# EAGLE board MAGNEBOT328RTM (EAGLE 7.6.0)
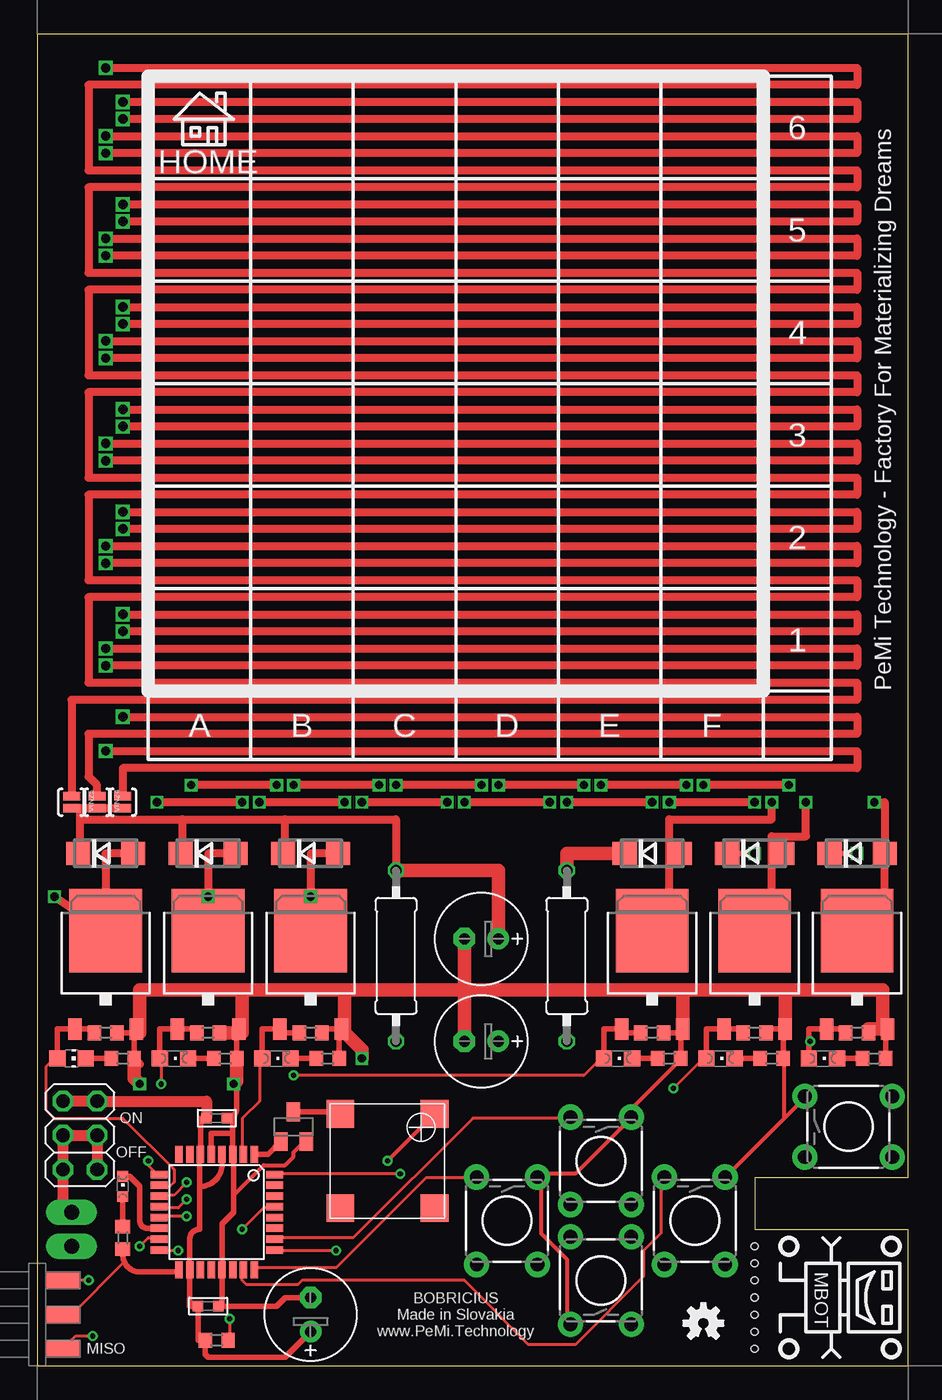
[diagram p0: board, top side]
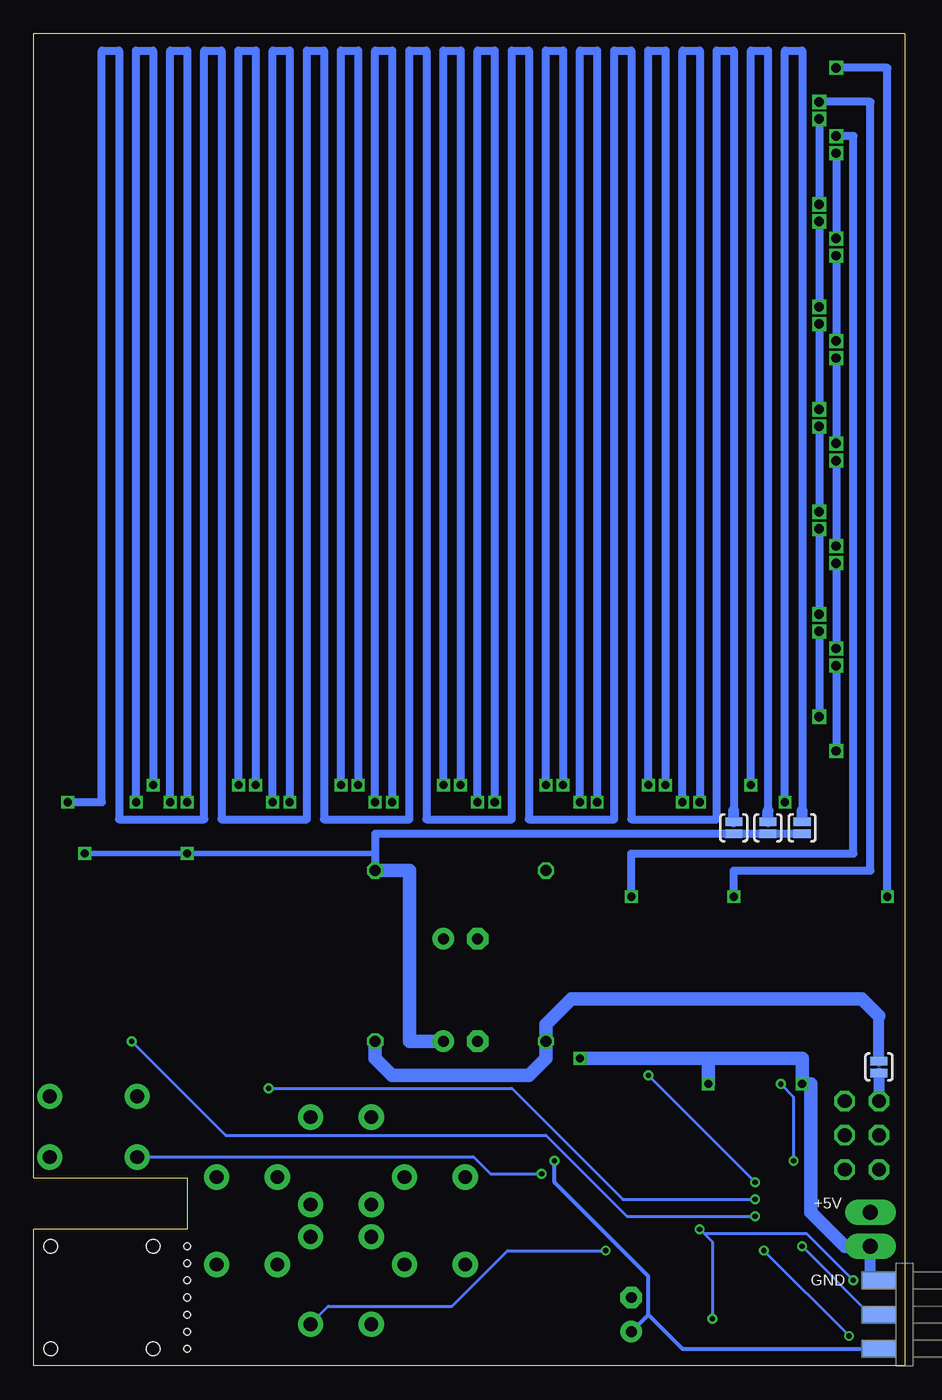
[diagram p1: board, bottom side, seen from below]

Size 64.77 x 99.06 mm. Coordinates in mm from the lower left corner, seen from the top.
Outline: 64.77,0 64.77,10.16 53.34,10.16 53.34,13.97 64.77,13.97 64.77,99.06 0,99.06 0,0 64.77,0
Copper layers (1*16): Top 0.0356mm / dielectric 1.5011mm / Bottom 0.0356mm
Design rules "LaenPCBOrder *": minimum track width 6mil, minimum drill 13mil, track to track 6mil, track to pad 6mil, pad to pad 6mil, via to via 6mil, smd to smd 6mil, copper to edge 15mil, drill to drill 6mil, minimum pad ring 7mil, minimum via ring 7mil, stop-mask expansion 4mil, vias tented up to drill 30mil, thermal gap 10mil
Net classes: 0 default: width 0.229 mm, drill 0.381 mm, clearance 0.254 mm; 1 vcc: width 0.305 mm, drill 0.381 mm, clearance 0.254 mm; 2 gnd: width 0.305 mm, drill 0.381 mm, clearance 0.254 mm
Holes 1 mm at 63.5,8.89 63.5,1.27 55.88,1.27 55.88,8.89
Holes 0.5 mm at 53.34,8.89 53.34,7.62 53.34,6.35 53.34,5.08 53.34,3.81 53.34,2.54 53.34,1.27

## Footprints (pad centres in the part's own frame; a part is rotated, then mirrored left to right if it is on the bottom)
E2,5-7 = drill 0.813 pad 1.6: + -1.27,0 | drill 0.813 pad 1.6 octagon: - 1.27,0
C0603 = smd 0.8 x 0.8: 1 -0.762,0; 2 0.762,0
DO214AC = smd 1.8 x 1.7: A 2.05,0; C -2.05,0
TQFP32-08 = smd 1.27 x 0.559: 1 -4.293,2.8; 2 -4.293,2; 3 -4.293,1.2; 4 -4.293,0.4; 5 -4.293,-0.4; 6 -4.293,-1.2; 7 -4.293,-2; 8 -4.293,-2.8; 17 4.293,-2.8; 18 4.293,-2; 19 4.293,-1.2; 20 4.293,-0.4; 21 4.293,0.4; 22 4.293,1.2; 23 4.293,2; 24 4.293,2.8 | smd 0.559 x 1.27: 9 -2.8,-4.293; 10 -2,-4.293; 11 -1.2,-4.293; 12 -0.4,-4.293; 13 0.4,-4.293; 14 1.2,-4.293; 15 2,-4.293; 16 2.8,-4.293; 25 2.8,4.293; 26 2,4.293; 27 1.2,4.293; 28 0.4,4.293; 29 -0.4,4.293; 30 -1.2,4.293; 31 -2,4.293; 32 -2.8,4.293
6_PIN_EDGE = smd 1.27 x 2.54: 1 2.54,0; 3 0,0; 5 -2.54,0 | smd 1.27 x 2.54 bottom: 2 2.54,0; 4 0,0; 6 -2.54,0
1X02_LONGPADS = drill 1.118 pad 1.88 long: 1 0,0; 2 2.54,0
2X03 = drill 1.016 octagon: 1 -2.54,-1.27; 2 -2.54,1.27; 3 0,-1.27; 4 0,1.27; 5 2.54,-1.27; 6 2.54,1.27
CHIPLED_0603 = smd 0.8 x 0.8: A 0,-0.75; C 0,0.75
CHIP-LED0805 = smd 1.2 x 1.2: A 0,-1.05; C 0,1.05
CHIPLED_0805 = smd 1.2 x 1.2: A 0,-1.05; C 0,1.05
SOT23 = smd 1 x 1.4: 1 -0.95,-1.1; 2 0.95,-1.1; 3 0,1.1
R0603 = smd 1 x 1.1: 1 -0.85,0; 2 0.85,0
0309/12 = drill 0.813 octagon: 1 -6.35,0; 2 6.35,0
TACTILE-PTH = drill 1.016 pad 1.88: 1 -3.251,2.261; 2 3.251,2.261; 3 -3.251,-2.261; 4 3.251,-2.261
TO252 = smd 1 x 1.6: 1 -2.28,-4.8; 2 2.28,-4.8 | smd 5.4 x 6.2: 3 0,2.5
SMT-8585-BUZZER = smd 2.05 x 2.05: + -3.5,-3.5; - 3.5,-3.5; NC1 -3.5,3.5; NC2 3.5,3.5
SJ_2S-NO = smd 0.635 x 1.27: 1 -0.45,0; 2 0.45,0

## Placement (x,y rotation side)
C1  10uF  [E2,5-7]  33.02,24.13 180 top
C2  10uF  [E2,5-7]  20.32,3.81 90 top
C4  10uF  [E2,5-7]  33.02,31.75 180 top
C14  100nF  [C0603]  12.7,4.45 0 top
C15  100nF  [C0603]  13.33,18.41 0 top
D2  [DO214AC]  5.08,38.1 0 top
D3  [DO214AC]  12.7,38.1 0 top
D4  [DO214AC]  20.32,38.1 0 top
D6  [DO214AC]  45.72,38.1 0 top
D7  [DO214AC]  53.34,38.1 0 top
D8  [DO214AC]  60.96,38.1 0 top
IC1  ATMEGA328P  [TQFP32-08]  13.33,11.43 270 top
ISP_HEADER  6_PIN_ISPEDGE-NORM  [6_PIN_EDGE]  1.91,3.81 270 top
J5  [1X02_LONGPADS]  2.54,8.89 90 top
JP4  [2X03]  3.18,17.14 90 top
LED1  [CHIPLED_0603]  6.35,13.34 0 top
LED2  [CHIP-LED0805]  2.54,22.86 270 top
LED3  [CHIPLED_0805]  10.16,22.86 270 top
LED4  [CHIPLED_0805]  17.78,22.86 270 top
LED6  [CHIPLED_0805]  43.18,22.86 270 top
LED7  [CHIPLED_0805]  50.8,22.86 270 top
LED8  [CHIPLED_0805]  58.42,22.86 270 top
LOGO3  OSHW-LOGOS  [OSHW-LOGO-S]  49.53,3.18 0 top
Q1  BSS123  [SOT23]  19.05,17.78 0 top
R1  4k7  [R0603]  13.33,1.9 0 top
R2  1k  [R0603]  6.35,9.53 90 top
R3  10R  [0309/12]  26.67,30.48 270 top
R4  10R  [0309/12]  39.37,30.48 270 top
R5  4.7k  [R0603]  5.08,24.77 180 top
R9  4.7k  [R0603]  6.35,22.86 180 top
R10  4.7k  [R0603]  12.7,24.77 180 top
R11  4.7k  [R0603]  13.97,22.86 180 top
R12  4.7k  [R0603]  20.32,24.77 180 top
R13  4.7k  [R0603]  21.59,22.86 180 top
R16  4.7k  [R0603]  45.72,24.77 180 top
R17  4.7k  [R0603]  46.99,22.86 180 top
R18  4.7k  [R0603]  53.34,24.77 180 top
R21  4.7k  [R0603]  54.61,22.86 180 top
R22  4.7k  [R0603]  60.96,24.77 180 top
R23  4.7k  [R0603]  62.23,22.86 180 top
S1  pb22  [TACTILE-PTH]  34.92,10.79 270 top
S3  pb22  [TACTILE-PTH]  41.91,6.35 90 top
S4  pb22  [TACTILE-PTH]  48.89,10.79 270 top
S5  pb22  [TACTILE-PTH]  41.91,15.24 270 top
S6  pb22  [TACTILE-PTH]  60.32,17.78 0 top
T2  IRLR110-ND  [TO252]  5.08,29.84 0 top
T3  IRLR110-ND  [TO252]  12.7,29.84 0 top
T4  IRLR110-ND  [TO252]  20.32,29.84 0 top
T6  IRLR110-ND  [TO252]  45.72,29.84 0 top
T7  IRLR110-ND  [TO252]  53.34,29.84 0 top
T8  IRLR110-ND  [TO252]  60.96,29.84 0 top
U$2  BUZZER  [SMT-8585-BUZZER]  26.03,15.24 180 top
VINZ  SOLDERJUMPERNO  [SJ_2S-NO]  7.62,40 270 bottom
VINZ1  SOLDERJUMPERNO  [SJ_2S-NO]  10.16,40 270 bottom
VINZ2  SOLDERJUMPERNO  [SJ_2S-NO]  12.7,40 270 bottom
VINZ3  SOLDERJUMPERNO  [SJ_2S-NO]  6.35,41.91 270 top
VINZ4  SOLDERJUMPERNO  [SJ_2S-NO]  4.45,41.91 270 top
VINZ5  SOLDERJUMPERNO  [SJ_2S-NO]  2.54,41.91 270 top
VINZ6  SOLDERJUMPERNO  [SJ_2S-NO]  1.91,22.23 90 bottom

## Library data of the parts
C1 C2 C4 R1-R5 R9-R13 R16-R18 R21-R23 = rcl
C14 C15 = rc-master-smd
D2-D4 D6-D8 = diode
IC1 = atmel; MPN: ATMEGA8-16AU; OC_FARNELL: 9171371; OC_NEWARK: 73M8863
ISP_HEADER = ppeter
J5 = SparkFun-Connectors
JP4 = pinhead
LED1-LED4 LED6-LED8 = led
LOGO3 = SparkFun-Aesthetics
Q1 = transistor-small-signal
S1 S3-S6 = SparkFun-Electromechanical; PROD_ID: SWCH-08441
T2-T4 T6-T8 = JVN
U$2 = adafruit
VINZ VINZ1-VINZ6 = SparkFun

## Nets
A0: IC1.23 S4.3
A1: IC1.24 S1.3
A2: IC1.25 S3.3
A3: IC1.26 S5.3
ADC6: IC1.19
ADC7: IC1.22
AREF: IC1.20
D2: IC1.32 S6.3
D3: IC1.1 Q1.1
D4: IC1.2 LED4.A R12.2 T4.1
D5: IC1.9 LED3.A R10.2 T3.1
D6: IC1.10 LED2.A R5.2 T2.1
D7: IC1.11 LED6.A R16.2 T6.1
D8: IC1.12 LED7.A R18.2 T7.1
D9: IC1.13 LED8.A R22.2 T8.1
D10: IC1.14 LED1.C
GND [vcc]: C1.- C2.- C4.- C14.2 C15.2 IC1.3 IC1.5 IC1.21 ISP_HEADER.6 J5.1 Q1.2 R5.1 R9.1 R10.1 R11.1 R12.1 R13.1 R16.1 R17.1 R18.1 R21.1 R22.1 R23.1 S1.1 S3.1 S4.1 S5.1 S6.1 T2.2 T3.2 T4.2 T6.2 T7.2 T8.2
MISO: IC1.16 ISP_HEADER.1
MOSI: IC1.15 ISP_HEADER.4
N$6: LED1.A R2.2
N$8: LED2.C R9.2
N$10: LED6.C R17.2
N$12: LED3.C R11.2
N$14: LED7.C R21.2
N$19: LED4.C R13.2
N$21: LED8.C R23.2
OUT: Q1.3 U$2.-
PB6: IC1.7
PB7: IC1.8
RESET: IC1.29 ISP_HEADER.5 R1.2
RXD: IC1.30
SCK: IC1.17 ISP_HEADER.3 R2.1
SCL: IC1.28
SDA: IC1.27
TXD: IC1.31
VCC [gnd]: C2.+ C14.1 C15.1 IC1.4 IC1.6 IC1.18 ISP_HEADER.2 JP4.5 JP4.6 R1.1 U$2.+ VINZ6.1
VIN: J5.2 JP4.1 JP4.2 JP4.3 JP4.4
VINX [gnd]: C4.+ D2.C D3.C D4.C R3.1 VINZ3.2 VINZ4.2 VINZ5.2
VINY [gnd]: C1.+ D6.C D7.C D8.C R4.1 VINZ1.2 VINZ2.2 VINZ.2
VUSB: R3.2 R4.2 VINZ6.2
X1: D2.A T2.3 VINZ5.1
X2: D3.A T3.3 VINZ4.1
X3: D4.A T4.3 VINZ3.1
Y1: D6.A T6.3 VINZ.1
Y2: D7.A T7.3 VINZ1.1
Y3: D8.A T8.3 VINZ2.1

## Tracks (layer width: path | path; a pad name or v marks a point on that pad's centre or on a via)
A0
  Top 0.229: IC1.23 15.24,6.99 15.24,6.35 15.56,6.03 19.37,6.03 19.69,6.35 31.75,6.35 36.51,1.59 40,1.59 45.09,6.67 45.09,8.57 46.35,9.84 46.35,13.97 S4.3
A1
  Top 0.229: IC1.24 16.19,7.3 22.23,7.3 28.89,13.97 32.38,13.97 S1.3
A2  (via drill 0.38)
  Top 0.229: v22.23,8.57 17.78,8.57 IC1.25
  Bottom 0.229: v22.23,8.57 29.53,8.57 33.66,4.45 42.86,4.45 44.13,3.18 S3.3
A3
  Top 0.229: IC1.26 17.78,9.53 23.49,9.53 32.38,18.41 39.37,18.41 S5.3
D2  (via drill 0.38)
  Top 0.229: v26.99,14.29 17.78,14.29 IC1.32
  Bottom 0.229: v26.99,14.29 30.8,14.29 32.07,15.56 56.83,15.56 S6.3
D3
  Top 0.406: IC1.1 17.14,15.72 Q1.1
D4
  Top 0.229: IC1.2 15.24,15.88 15.24,18.41 16.51,19.68 16.51,22.86 LED4.A
  Top 0.406: R12.2 18.04,24.77 T4.1 16.73,25.05 LED4.A
D5  (via drill 0.38)
  Top 0.229: v8.26,15.24 8.26,14.92 8.89,14.29 IC1.9 | v9.21,20.96 9.21,22.86 LED3.A
  Top 0.406: R10.2 11.85,25.05 T3.1 9.11,25.05 LED3.A
  Bottom 0.229: v8.26,15.24 8.26,20 v9.21,20.96
D6
  Top 0.229: IC1.10 9.21,13.34 9.84,13.34 10.16,13.65 10.16,14.61 6.35,18.41 1.27,18.41 0.64,19.05 0.64,22.23 1.27,22.86 LED2.A
  Top 0.406: R5.2 4.23,25.05 T2.1 1.49,25.05 LED2.A
D7  (via drill 0.38)
  Top 0.229: v11.11,13.65 10.16,12.7 9.21,12.7 IC1.11 | v19.05,21.59 40.64,21.59 41.91,22.86 LED6.A
  Top 0.406: LED6.A 42.13,25.05 T6.1 43.44,24.77 R16.2
  Bottom 0.229: v19.05,21.59 v11.11,13.65
D8  (via drill 0.38)
  Top 0.229: v11.11,12.38 10.48,11.75 9.21,11.75 IC1.12 | v47.31,20.64 49.53,22.86 LED7.A
  Top 0.406: R18.2 52.49,25.05 T7.1 49.75,25.05 LED7.A
  Bottom 0.229: v11.11,12.38 20.95,12.38 29.21,20.64 v47.31,20.64
D9  (via drill 0.38)
  Top 0.229: v11.11,11.11 9.21,11.11 IC1.13 | v57.47,24.13 57.37,24.13
  Top 0.406: LED8.A 57.37,24.13 57.37,25.05 T8.1 60.11,25.05 R22.2
  Bottom 0.229: v11.11,11.11 20.64,11.11 26.67,17.14 50.48,17.14 v57.47,24.13
D10
  Top 0.406: LED1.C 6.87,14.09 7.62,13.34 7.62,10.79 arc90 8.19,10.23 IC1.14
GND  (via drill 0.6)
  Top 0.305: S3.1 39.37,3.18 39.37,7.94 37.46,9.84 37.46,13.97 S1.1 37.46,14.29 40,14.29 44.13,18.41 S5.1 44.45,18.73 44.45,19.37 47.94,22.86 R17.1 | 14.6,12.7 16.83,14.92 18.41,14.92 19.05,15.56 19.05,15.88 19.69,16.51 Q1.2 | 55.56,18.41 57.15,20 S6.1 | 55.56,18.41 51.43,14.29 S4.1 | 55.56,18.41 55.56,22.86 R21.1
  Top 0.406: R5.1 7.36,24.77 T2.2 7.2,25.05 R9.1 | R10.1 14.98,24.77 T3.2 14.82,25.05 R11.1 14.82,19.14 arc-90 C15.2 14.54,18.41 14.54,17.29 | T4.2 22.44,25.05 | 22.44,25.05 R13.1 | 22.44,25.05 21.17,25.05 R12.1 | R16.1 48,24.77 T6.2 47.84,25.05 R17.1 | R18.1 54.19,25.05 T7.2 55.46,25.05 R21.1 | R22.1 61.81,25.05 T8.2 63.08,25.05 R23.1 | 14.54,17.29 IC1.3 14.6,15.72 14.6,12.7 14.6,11.43 13.74,10.56 IC1.21 13.74,4.45 C14.2 17.78,4.45 18.41,5.08 C2.- | 14.54,17.29 12.94,17.29 IC1.5
  Top 0.61: 7.62,22.44 R9.1
  Top 1.016: C4.- 31.75,27.94 | 31.75,27.94 C1.- | 22.86,27.94 22.86,25.05 T4.2 24.13,23.52 v24.13,22.86 | 22.86,27.94 31.75,27.94 | R10.1 15.24,24.77 15.24,27.94 | 15.24,27.94 22.86,27.94 | 7.36,24.77 7.62,24.77 7.62,27.94 15.24,27.94 | 61.81,25.05 62.87,25.05 62.87,27.94 55.62,27.94 | 55.62,27.94 48,27.94 | 48,27.94 T6.2 | 55.62,27.94 T7.2 | 48,27.94 31.75,27.94 | R9.1 7.2,21.38 v7.62,20.96 | R11.1 14.82,21.17 v14.6,20.96
  Bottom 0.813: ISP_HEADER.6 2.54,6.35 J5.1
  Bottom 1.016: J5.1 4.45,8.89 6.99,11.43 6.99,20.96 v7.62,20.96 7.62,22.86 14.6,22.86 | v14.6,20.96 14.6,22.86 | 14.6,22.86 v24.13,22.86
MISO  (via drill 0.38)
  Top 0.229: v10.48,8.57 9.21,8.57 IC1.16 | v4.13,2.22 2.86,2.22 ISP_HEADER.1
  Bottom 0.229: v4.13,2.22 v10.48,8.57
MOSI  (via drill 0.38)
  Top 0.229: v7.62,8.89 8.26,9.53 8.89,9.53 IC1.15
  Bottom 0.229: v7.62,8.89 2.54,3.81 ISP_HEADER.4
N$6
  Top 0.406: LED1.A R2.2
N$8
  Top 0.406: LED2.C R9.2
N$10
  Top 0.406: R17.2 LED6.C
N$12
  Top 0.406: LED3.C R11.2
N$14
  Top 0.406: R21.2 LED7.C
N$19
  Top 0.406: LED4.C R13.2
N$21
  Top 0.406: R23.2 LED8.C
OUT
  Top 0.406: Q1.3 22.4,18.88 U$2.-
RESET  (via drill 0.38)
  Top 0.229: v14.29,3.49 14.29,1.9 R1.2 | v15.24,10.16 16.83,11.75 17.46,11.75 IC1.29 | v3.81,6.35 ISP_HEADER.5
  Bottom 0.229: v14.29,3.49 14.29,9.21 14.92,9.84 | v15.24,10.16 14.92,9.84 | v3.81,6.35 7.3,9.84 14.92,9.84
SCK
  Top 0.229: ISP_HEADER.3 2.54,3.81 6.35,7.62 6.48,7.69
  Top 0.406: R2.1 6.35,8.26 arc27 6.48,7.69 arc63 7.62,6.99 10.38,6.99 arc90 IC1.17
VCC  (via drill 0.38)
  Top 0.305: v26.03,15.24 U$2.+
  Top 0.406: C15.1 12.13,18.41 IC1.6 arc90 12.06,15.65 12.06,13.34 | C2.+ 18.41,0.64 12.7,0.64 12.49,0.85 R1.1 11.94,1.9 C14.1 11.33,4.45 IC1.18 11.33,9.43 arc-90 12.06,10.16 12.06,13.34 | IC1.4 13.74,15 arc-90 12.06,13.34
  Top 0.813: JP4.6 JP4.5 12.57,19.68 C15.1
  Bottom 0.305: v26.03,15.24 26.03,13.65 19.05,6.67 19.05,3.81 | C2.+ 19.05,3.81 | ISP_HEADER.2 16.51,1.27 19.05,3.81
  Bottom 0.813: VINZ6.1 JP4.6
VIN
  Top 0.813: J5.2 1.91,11.43 JP4.2 JP4.4 JP4.3 JP4.1
VINX
  Top 0.61: VINZ3.2 VINZ4.2 3.18,41.46 | 3.18,41.46 VINZ5.2 | D2.C 3.18,38.1 3.18,40.64 | 3.18,40.64 3.18,41.46 | 3.18,40.64 10.79,40.64 | 10.79,40.64 18.41,40.64 | 18.41,40.64 26.67,40.64 R3.1 | D3.C 10.79,38.1 10.79,40.64 | D4.C 18.41,38.1 18.41,40.64
  Top 1.016: R3.1 34.29,36.83 C4.+
VINY  (via drill 0.6)
  Top 0.406: D8.C v60.96,38.1 | v53.34,38.1 D7.C
  Top 1.016: R4.1 39.37,38.1 D6.C
  Bottom 0.406: v60.96,38.1 v53.34,38.1 39.37,38.1 R4.1
  Bottom 0.61: VINZ.2 VINZ1.2 VINZ2.2 39.37,39.55 R4.1
  Bottom 1.016: C1.+ 36.83,24.13 36.83,36.83 R4.1
VUSB
  Bottom 0.813: VINZ6.2 1.91,26.04
  Bottom 1.016: 1.91,26.04 3.18,27.3 24.77,27.3 26.67,25.4 R3.2 26.67,22.86 27.94,21.59 38.1,21.59 39.37,22.86 R4.2
X1  (via drill 0.6, 0.7)
  Top 0.61: v1.27,34.88 T2.3 5.08,38.1 D2.A | v5.08,96.52 60.96,96.52 60.96,95.25 3.81,95.25 3.81,88.9 60.96,88.9 60.96,87.63 3.81,87.63 3.81,81.28 60.96,81.28 60.96,80.01 3.81,80.01 3.81,73.66 60.96,73.66 60.96,72.39 3.81,72.39 3.81,66.04 60.96,66.04 60.96,64.77 3.81,64.77 3.81,58.42 60.96,58.42 60.96,57.15 3.81,57.15 3.81,50.8 60.96,50.8 60.96,49.53 2.54,49.53 VINZ5.1
  Bottom 0.61: v1.27,34.88 1.27,96.52 v5.08,96.52
X2  (via drill 0.6, 0.7)
  Top 0.61: T3.3 v12.7,34.88 12.7,38.1 D3.A | v6.35,93.98 60.96,93.98 60.96,92.71 v6.35,92.71 | v6.35,86.36 60.96,86.36 60.96,85.09 v6.35,85.09 | v6.35,78.74 60.96,78.74 60.96,77.47 v6.35,77.47 | v6.35,71.12 60.96,71.12 60.96,69.85 v6.35,69.85 | v6.35,63.5 60.96,63.5 60.96,62.23 v6.35,62.23 | v6.35,55.88 60.96,55.88 60.96,54.61 v6.35,54.61 | v6.35,48.26 60.96,48.26 60.96,46.99 3.81,46.99 3.81,43.81 4.45,43.18 VINZ4.1
  Bottom 0.61: v12.7,34.88 12.7,36.83 2.54,36.83 2.54,93.98 v6.35,93.98 | v6.35,92.71 v6.35,86.36 | v6.35,85.09 v6.35,78.74 | v6.35,77.47 v6.35,71.12 | v6.35,69.85 v6.35,63.5 | v6.35,62.23 v6.35,55.88 | v6.35,54.61 v6.35,48.26
X3  (via drill 0.6, 0.7)
  Top 0.61: T4.3 v20.32,34.88 20.32,38.1 D4.A | v5.08,91.44 60.96,91.44 60.96,90.17 v5.08,90.17 | v5.08,83.82 60.96,83.82 60.96,82.55 v5.08,82.55 | v5.08,76.2 60.96,76.2 60.96,74.93 v5.08,74.93 | v5.08,68.58 60.96,68.58 60.96,67.31 v5.08,67.31 | v5.08,60.96 60.96,60.96 60.96,59.69 v5.08,59.69 | v5.08,53.34 60.96,53.34 60.96,52.07 v5.08,52.07 | v5.08,45.72 60.96,45.72 60.96,44.45 6.35,44.45 VINZ3.1
  Bottom 0.61: v20.32,34.88 20.32,38.1 3.81,38.1 3.81,91.44 v5.08,91.44 | v5.08,90.17 v5.08,83.82 | v5.08,82.55 v5.08,76.2 | v5.08,74.93 v5.08,68.58 | v5.08,67.31 v5.08,60.96 | v5.08,59.69 v5.08,53.34 | v5.08,52.07 v5.08,45.72
Y1  (via drill 0.6)
  Top 0.61: v54.61,41.91 54.61,40.64 46.99,40.64 46.99,38.1 | v53.34,41.91 v46.99,41.91 | v45.72,41.91 v39.37,41.91 | v38.1,41.91 v31.75,41.91 | v30.48,41.91 v24.13,41.91 | v22.86,41.91 v16.51,41.91 | v15.24,41.91 v8.89,41.91 | T6.3 46.99,32.34 46.99,38.1 | D6.A 46.99,38.1
  Bottom 0.229: 7.62,40.64 VINZ.1
  Bottom 0.61: v54.61,41.91 54.61,97.79 53.34,97.79 v53.34,41.91 | v46.99,41.91 46.99,97.79 45.72,97.79 v45.72,41.91 | v39.37,41.91 39.37,97.79 38.1,97.79 v38.1,41.91 | v31.75,41.91 31.75,97.79 30.48,97.79 v30.48,41.91 | v24.13,41.91 24.13,97.79 22.86,97.79 v22.86,41.91 | v16.51,41.91 16.51,97.79 15.24,97.79 v15.24,41.91 | v8.89,41.91 8.89,97.79 7.62,97.79 7.62,41.27
  Bottom 0.813: 7.62,40.64 7.62,41.27
Y2  (via drill 0.6)
  Top 0.61: 54.61,31.07 T7.3 54.61,32.34 54.61,38.1 | v57.15,41.91 57.15,39.37 54.61,39.37 54.61,38.1 | v55.88,43.18 v49.53,43.18 | v48.26,43.18 v41.91,43.18 | v40.64,43.18 v34.29,43.18 | v33.02,43.18 v26.67,43.18 | v25.4,43.18 v19.05,43.18 | v17.78,43.18 v11.43,43.18 | D7.A 54.61,38.1
  Bottom 0.61: v57.15,41.91 57.15,97.79 55.88,97.79 v55.88,43.18 | v49.53,43.18 49.53,97.79 48.26,97.79 v48.26,43.18 | v41.91,43.18 41.91,97.79 40.64,97.79 v40.64,43.18 | v34.29,43.18 34.29,97.79 33.02,97.79 v33.02,43.18 | v26.67,43.18 26.67,97.79 25.4,97.79 v25.4,43.18 | v19.05,43.18 19.05,97.79 17.78,97.79 v17.78,43.18 | v11.43,43.18 11.43,97.79 10.16,97.79 10.16,41.27 10.16,40.64
  Bottom 0.813: VINZ1.1 10.16,41.27
Y3  (via drill 0.6)
  Top 0.61: v62.23,41.91 63.01,41.91 D8.A 63.01,32.34 T8.3
  Bottom 0.61: 12.7,40.64 12.7,41.27 12.7,97.79 13.97,97.79 13.97,40.64 20.32,40.64 20.32,97.79 21.59,97.79 21.59,40.64 27.94,40.64 27.94,97.79 29.21,97.79 29.21,40.64 35.56,40.64 35.56,97.79 36.83,97.79 36.83,40.64 43.18,40.64 43.18,97.79 44.45,97.79 44.45,40.64 50.8,40.64 50.8,97.79 52.07,97.79 52.07,40.64 58.42,40.64 58.42,97.79 59.69,97.79 59.69,41.91 v62.23,41.91
  Bottom 0.813: VINZ2.1 12.7,41.27

## Text on the board
tNames: 6 | HOME | 5 | 4 | PeMi Technology - Factory For Materializing Dreams | 3 | 2 | 1 | A | B | C | D | E | F | ON | OFF | MBOT | BOBRICIUS / Made in Slovakia / www.PeMi.Technology | MISO
bNames: +5V | GND